# EAGLE board BOARD NWE (EAGLE 9.6.2)
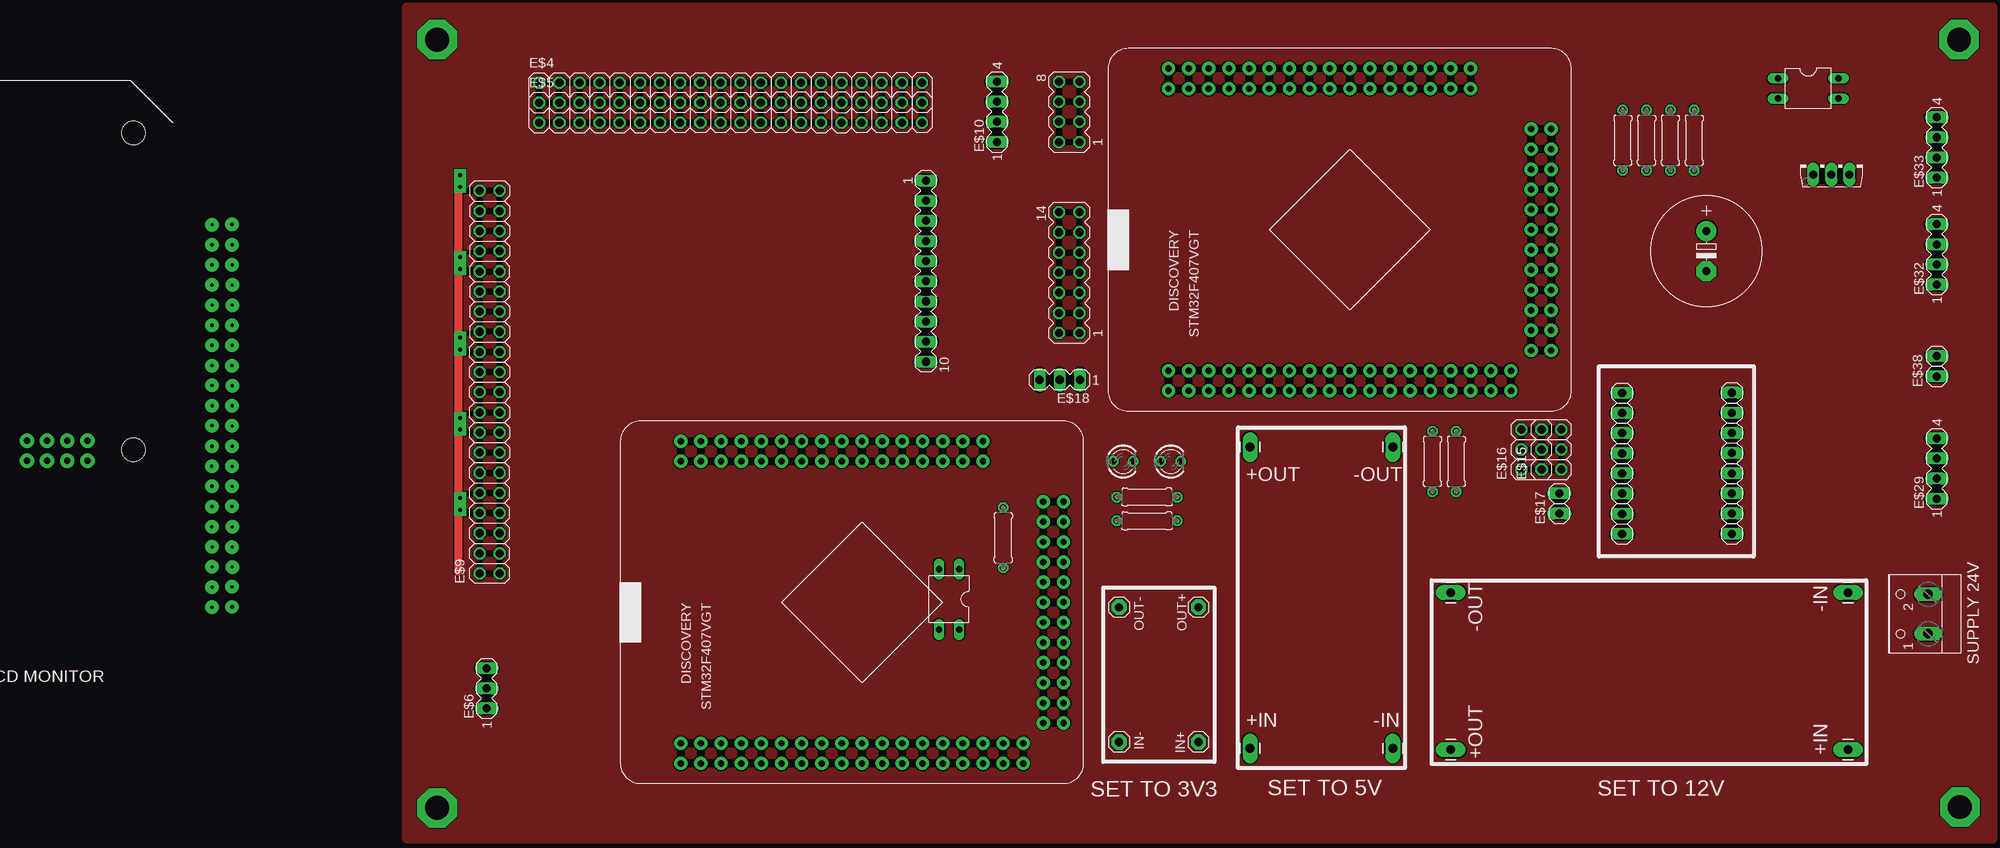
[diagram p0: board, top side]
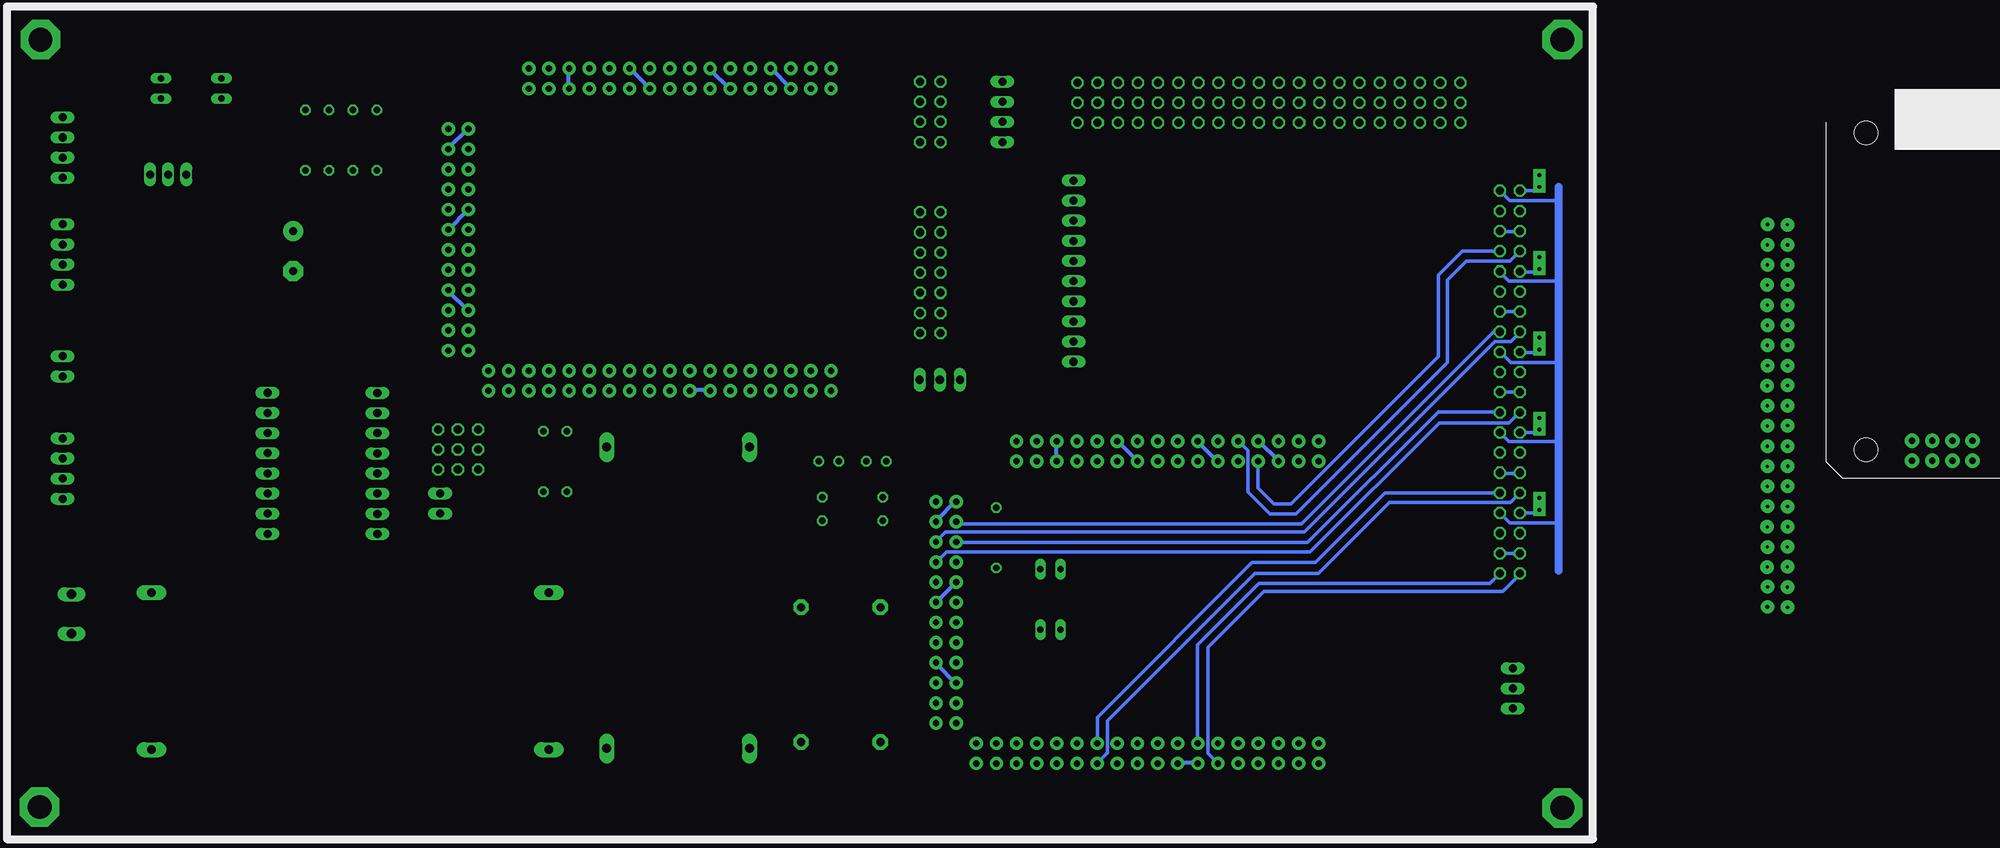
[diagram p1: board, bottom side, seen from below]

No outline drawn. Coordinates in mm, seen from the top.
Copper layers (1*16): Top 0.035mm / dielectric 1.5mm / Bottom 0.035mm
Design rules "default": minimum track width 6mil, minimum drill 0.35mm, track to track 6mil, track to pad 6mil, pad to pad 6mil, via to via 6mil, smd to smd 6mil, copper to edge 40mil, drill to drill 6mil, minimum pad ring 10mil, minimum via ring 8mil, stop-mask expansion 4mil, vias tented up to drill 0mil, thermal gap 10mil

## Footprints (pad centres in the part's own frame; a part is rotated, then mirrored left to right if it is on the bottom)
STM32F407VGT = drill 0.8 pad 1.676: 1 22.86,12.7; 2 25.4,12.7; 3 22.86,15.24; 3.3V(0) -12.7,-25.4; 3.3V(1) 22.86,-20.32; 3.3V(3) 10.16,17.78; 4 25.4,15.24; GND -15.24,-27.94; GND(0) -15.24,-25.4; GND(1) 25.4,-20.32; GND(2) -15.24,10.16; GND(3) 12.7,17.78; PA0 25.4,-15.24; PA1 22.86,-12.7; PA2 25.4,-12.7; PA3 25.4,-10.16; PA4 22.86,-7.62; PA5 25.4,-7.62; PA6 22.86,-5.08; PA7 25.4,-5.08; PA8 -15.24,7.62; PA9 -12.7,5.08; PA10 -15.24,5.08; PA11 -12.7,2.54; PA12 -15.24,2.54; PA13 -12.7,0; PA14 -15.24,0; PA15 -12.7,-2.54; PB0 22.86,0; PB1 25.4,0; PB2 25.4,10.16; PB3 -12.7,-17.78; PB4 -15.24,-17.78; PB5 -12.7,-20.32; PB6 -15.24,-20.32; PB7 -12.7,-22.86; PB8 22.86,2.54; PB9 25.4,2.54; PB10 15.24,17.78; PB11 12.7,20.32; PB12 10.16,20.32; PB13 7.62,17.78; PB14 7.62,20.32; PB15 5.08,17.78; PC0 22.86,-17.78; PC1 25.4,-17.78; PC2 22.86,-15.24; PC3 22.86,-10.16; PC4 22.86,-2.54; PC5 25.4,-2.54; PC6 -5.08,20.32; PC7 -7.62,17.78; PC8 -7.62,20.32; PC9 -12.7,7.62; PC10 -15.24,-2.54; PC11 -12.7,-5.08; PC12 -15.24,-5.08; PC13 25.4,-22.86; PD0 -12.7,-7.62; PD1 -15.24,-7.62; PD2 -12.7,-10.16; PD3 -15.24,-10.16; PD4 -12.7,-12.7; PD5 -15.24,-12.7; PD6 -12.7,-15.24; PD7 -15.24,-15.24; PD8 5.08,20.32; PD9 2.54,17.78; PD10 2.54,20.32; PD11 0,17.78; PD12 0,20.32; PD13 -2.54,17.78; PD14 -2.54,20.32; PD15 -5.08,17.78; PE0 -15.24,-22.86; PE1 22.86,5.08; PE2 22.86,-27.94; PE3 25.4,-27.94; PE4 22.86,-25.4; PE5 25.4,-25.4; PE6 22.86,-22.86; PE7 25.4,5.08; PE8 22.86,7.62; PE9 25.4,7.62; PE10 22.86,10.16; PE11 20.32,20.32; PE12 20.32,17.78; PE13 17.78,20.32; PE14 17.78,17.78; PE15 15.24,20.32; VCC -12.7,-27.94; VCC(2) -12.7,10.16
MA10-1 = drill 1.016 long: 1 -11.43,0; 2 -8.89,0; 3 -6.35,0; 4 -3.81,0; 5 -1.27,0; 6 1.27,0; 7 3.81,0; 8 6.35,0; 9 8.89,0; 10 11.43,0
2X20 = drill 1.016 octagon: 1 -24.13,-1.27; 2 -24.13,1.27; 3 -21.59,-1.27; 4 -21.59,1.27; 5 -19.05,-1.27; 6 -19.05,1.27; 7 -16.51,-1.27; 8 -16.51,1.27; 9 -13.97,-1.27; 10 -13.97,1.27; 11 -11.43,-1.27; 12 -11.43,1.27; 13 -8.89,-1.27; 14 -8.89,1.27; 15 -6.35,-1.27; 16 -6.35,1.27; 17 -3.81,-1.27; 18 -3.81,1.27; 19 -1.27,-1.27; 20 -1.27,1.27; 21 1.27,-1.27; 22 1.27,1.27; 23 3.81,-1.27; 24 3.81,1.27; 25 6.35,-1.27; 26 6.35,1.27; 27 8.89,-1.27; 28 8.89,1.27; 29 11.43,-1.27; 30 11.43,1.27; 31 13.97,-1.27; 32 13.97,1.27; 33 16.51,-1.27; 34 16.51,1.27; 35 19.05,-1.27; 36 19.05,1.27; 37 21.59,-1.27; 38 21.59,1.27; 39 24.13,-1.27; 40 24.13,1.27
MA03-1 = drill 1.016 long: 1 -2.54,0; 2 0,0; 3 2.54,0
MA04-2 = drill 1.016 octagon: 1 -3.81,-1.27; 2 -3.81,1.27; 3 -1.27,-1.27; 4 -1.27,1.27; 5 1.27,-1.27; 6 1.27,1.27; 7 3.81,-1.27; 8 3.81,1.27
DRIVER_BTS = drill 0.8 pad 1.8: GND 26.28,-41.42; L_EN 31.36,-41.42; L_IS 28.82,-41.42; LPWM 33.9,-41.42; R_EN 31.36,-38.88; R_IS 28.82,-38.88; RPWM 33.9,-38.88; VCC 26.28,-38.88 | hole 3: 0.01,-40.03; 39.73,-40.05; 0.01,-0.03; 39.73,-0.05
MA04-1 = drill 1.016 long: 1 -3.81,0; 2 -1.27,0; 3 1.27,0; 4 3.81,0
LED3MM = drill 0.813 octagon: A -1.27,0; K 1.27,0
1X01_LONGPAD = drill 1.118 pad 1.88 long: 1 0,0
2X03 = drill 1.016 octagon: 1 -2.54,-1.27; 2 -2.54,1.27; 3 0,-1.27; 4 0,1.27; 5 2.54,-1.27; 6 2.54,1.27
1X02 = drill 1.016 long: 1 -1.27,0; 2 1.27,0
0207/7 = drill 0.813 octagon: 1 -3.81,0; 2 3.81,0
1X08 = drill 1.016 long: 1 -8.89,0; 2 -6.35,0; 3 -3.81,0; 4 -1.27,0; 5 1.27,0; 6 3.81,0; 7 6.35,0; 8 8.89,0
DIL04 = drill 0.813 long: 1 -1.27,-3.81; 2 1.27,-3.81; 3 1.27,3.81; 4 -1.27,3.81
W237-102 = drill 1.194 long: 1 -2.5,-1.27; 2 2.5,-1.27
MA07-2 = drill 1.016 octagon: 1 -7.62,-1.27; 2 -7.62,1.27; 3 -5.08,-1.27; 4 -5.08,1.27; 5 -2.54,-1.27; 6 -2.54,1.27; 7 0,-1.27; 8 0,1.27; 9 2.54,-1.27; 10 2.54,1.27; 11 5.08,-1.27; 12 5.08,1.27; 13 7.62,-1.27; 14 7.62,1.27
E5-13 = drill 1.016 pad 2.54: + -2.54,0 | drill 1.016 pad 2.54 octagon: - 2.54,0
TO126AV = drill 1.016 long: B 2.286,-1.27; C 0,-1.27; E -2.286,-1.27
1X01 = drill 1.016 pad 1.93 octagon: 1 0,0

## Placement (x,y rotation side)
E$1  [STM32F407VGT]  234.66,115.31 270 top
E$2  [STM32F407VGT]  173.16,68.31 270 top
E$3  [MA10-1]  176.12,105 270 top
E$4  [2X20]  151.5,127.5 0 top
E$5  [2X20]  151.5,125 0 top
E$6  [MA03-1]  120.75,52.38 90 top
E$7  [MA04-2]  194.2,125.1 90 top
E$8  [DRIVER_BTS]  36.5,122.5 0 top
E$9  [2X20]  121.12,91 90 top
E$10  [MA04-1]  185.1,125.1 90 top
E$11  [LED3MM]  201,81 0 top
E$12  [1X01_LONGPAD]  235,82.8 180 top
E$13  [1X01_LONGPAD]  217,82.8 180 top
E$14  [LED3MM]  207,81 0 top
E$15  [2X03]  255,82.5 90 top
E$16  [2X03]  252.5,82.5 90 top
E$17  [1X02]  256,75.7 90 top
E$18  [MA03-1]  193,91.3 180 top
E$19  [0207/7]  204,76.5 180 top
E$20  [0207/7]  204,73.5 180 top
E$21  [0207/7]  240,81 270 top
E$22  [0207/7]  243,81 270 top
E$23  [1X01_LONGPAD]  242.3,44.65 90 top
E$24  [1X01_LONGPAD]  242.3,64.45 90 top
E$25  [1X01_LONGPAD]  292.4,64.45 90 top
E$26  [1X01_LONGPAD]  292.4,44.65 90 top
E$27  [1X01_LONGPAD]  235,44.8 180 top
E$28  [1X01_LONGPAD]  217,44.8 180 top
E$29  [MA04-1]  303.6,80.1 90 top
E$30  [1X08]  263.91,80.75 90 top
E$31  [1X08]  277.77,80.77 90 top
E$32  [MA04-1]  303.6,107.1 90 top
E$33  [MA04-1]  303.6,120.6 90 top
E$34  [0207/7]  264,121.5 270 top
E$35  [0207/7]  267,121.5 270 top
E$36  [0207/7]  270,121.5 270 top
E$37  [0207/7]  273,121.5 270 top
E$38  [1X02]  303.6,93 90 top
E$39  [DIL04]  179.05,63.62 180 top
E$40  [0207/7]  185.88,71.38 270 top
E$45  [W237-102]  301.22,61.75 90 top
E$46  [MA07-2]  194.2,104.81 90 top
E$93  [E5-13]  274.53,107.53 270 top
E$94  [TO126AV]  290.3,118.45 0 top
E$95  [DIL04]  287.38,128.05 270 top
IN+  [1X01]  210.5,45.6 270 top
IN-  [1X01]  200.5,45.6 270 top
OUT+  [1X01]  210.5,62.6 270 top
OUT-  [1X01]  200.5,62.6 270 top

## Library data of the parts
E$1 E$2 E$8 = KRI COMPONENT
E$3 E$6 E$7 E$10 E$18 E$29 E$32 E$33 E$46 = con-lstb
E$4 E$5 E$9 IN+ IN- OUT+ OUT- = adafruit
E$11 E$14 = led
E$12 E$13 E$23-E$28 = SparkFun-Connectors
E$15-E$17 E$38 = Connector
E$19-E$22 E$34-E$37 E$40 E$93 = rcl
E$30 E$31 = pinhead
E$39 E$95 = ic-package
E$45 = con-wago-500
E$94 = transistor-power

## Nets
S$18: IN-.1
S$43: OUT+.1
S$44: OUT-.1
S$78: E$13.1
S$145: E$30.7
S$156: E$12.1
S$196: IN+.1
S$214: E$26.1

## Tracks (layer width: path | path; a pad name or v marks a point on that pad's centre or on a via)
DD
  pour Top: 110.6,138.4 310.7,138.4 310.7,33.3 110.6,33.3 110.6,138.4
S$1
  Bottom 0.5: 222,90 224.5,90
S$2
  Bottom 0.5: 239.8,128 239.8,130.5
S$3
  Bottom 0.5: 214.3,130.6 211.8,128.1
S$4
  Bottom 0.5: 255,102.5 252.5,100
S$5
  Bottom 0.5: 232.1,130.6 229.5,128
S$6
  Bottom 0.5: 222,130.5 219.5,128
S$7
  Bottom 0.5: 255,110.2 252.4,112.8
S$8
  Bottom 0.5: 252.5,123 255,120.5
S$9
  Bottom 0.5: 160.5,43 163,43
S$10
  Bottom 0.5: 178.3,81 178.3,83.5
S$11
  Bottom 0.5: 152.8,83.6 150.3,81.1
S$12
  Bottom 0.5: 193.5,55.5 191,53
S$13
  Bottom 0.5: 170.6,83.6 168,81
S$14
  Bottom 0.5: 160.5,83.5 158,81
S$15
  Bottom 0.5: 193.5,63.2 190.9,65.8
S$16
  Bottom 0.5: 191,76 193.5,73.5
S$17  (via drill 0.4 pad 1.7)
  other vias: 86.12,110.85
S$19  (via drill 0.4 pad 1.7)
  other vias: 88.62,110.9
S$20  (via drill 0.4 pad 1.7)
  other vias: 88.65,108.33
S$21  (via drill 0.4 pad 1.7)
  other vias: 86.1,108.33
S$22  (via drill 0.4 pad 1.7)
  other vias: 86.1,105.8
S$23  (via drill 0.4 pad 1.7)
  other vias: 88.65,105.8
S$24  (via drill 0.4 pad 1.7)
  other vias: 86.1,103.25
S$25  (via drill 0.4 pad 1.7)
  other vias: 88.67,103.25
S$26  (via drill 0.4 pad 1.7)
  other vias: 86.12,100.7
S$27  (via drill 0.4 pad 1.7)
  other vias: 88.67,100.7
S$28  (via drill 0.4 pad 1.7)
  other vias: 86.1,98.17
S$29  (via drill 0.4 pad 1.7)
  other vias: 88.65,98.17
S$30  (via drill 0.4 pad 1.7)
  other vias: 86.1,95.65
S$31  (via drill 0.4 pad 1.7)
  other vias: 88.65,95.65
S$32  (via drill 0.4 pad 1.7)
  other vias: 86.1,93.08
S$33  (via drill 0.4 pad 1.7)
  other vias: 88.62,93.08
S$34  (via drill 0.4 pad 1.7)
  other vias: 86.1,90.58
S$35  (via drill 0.4 pad 1.7)
  other vias: 88.67,90.55
S$36  (via drill 0.4 pad 1.7)
  other vias: 88.65,88.03
S$37  (via drill 0.4 pad 1.7)
  other vias: 86.12,88.03
S$38  (via drill 0.4 pad 1.7)
  other vias: 86.1,85.53
S$39  (via drill 0.4 pad 1.7)
  other vias: 88.65,85.47
S$40  (via drill 0.4 pad 1.7)
  other vias: 88.65,82.92
S$41  (via drill 0.4 pad 1.7)
  other vias: 86.1,82.92
S$42  (via drill 0.4 pad 1.7)
  other vias: 86.08,80.4
S$45  (via drill 0.4 pad 1.7)
  other vias: 88.65,80.38
S$46  (via drill 0.4 pad 1.7)
  other vias: 86.1,77.88
S$47  (via drill 0.4 pad 1.7)
  other vias: 88.65,77.85
S$48  (via drill 0.4 pad 1.7)
  other vias: 86.1,75.3
S$49  (via drill 0.4 pad 1.7)
  other vias: 88.62,75.33
S$50  (via drill 0.4 pad 1.7)
  other vias: 86.08,72.78
S$51  (via drill 0.4 pad 1.7)
  other vias: 88.67,72.75
S$52  (via drill 0.4 pad 1.7)
  other vias: 86.12,70.22
S$53  (via drill 0.4 pad 1.7)
  other vias: 88.65,70.2
S$54  (via drill 0.4 pad 1.7)
  other vias: 86.12,67.7
S$55  (via drill 0.4 pad 1.7)
  other vias: 88.67,67.67
S$56  (via drill 0.4 pad 1.7)
  other vias: 86.12,65.15
S$57  (via drill 0.4 pad 1.7)
  other vias: 88.62,65.17
S$58  (via drill 0.4 pad 1.7)
  other vias: 86.1,62.6
S$59  (via drill 0.5 pad 1.7)
  other vias: 88.65,62.65
S$60
  Bottom 0.45: 122.38,107.5 127.12,107.5 130.12,104.5 130.12,94.25 148.75,75.62 150.88,75.62 152.88,77.62 152.88,81
S$62
  Bottom 0.45: 119.88,97.25 121,96.12 123,96.12 147,72.12 192.25,72.12 193.5,70.88
S$63
  Bottom 0.45: 122.38,97.38 123.12,97.38 147.38,73.12 190.62,73.12 190.88,73.38
S$64
  Bottom 0.45: 122.38,87.25 130.12,87.25 146.62,70.75 191,70.75
S$65
  Bottom 0.45: 119.88,87.25 121.25,85.88 130,85.88 146.3,69.58 192.18,69.58 193.5,68.25
S$66
  Bottom 0.45: 122.5,77 136.88,77 145.62,68.25 153.62,68.25 173.12,48.75 173.12,45.5
S$67
  Bottom 0.45: 119.88,77 121.08,75.8 136.32,75.8 145.25,66.88 153.25,66.88 171.88,48.25 171.88,44.25 173.12,43
S$68
  Bottom 0.45: 122.38,66.88 123.62,65.62 152.75,65.62 160.5,57.88 160.5,45.5
S$69
  Bottom 0.45: 119.75,66.88 122,64.62 152.12,64.62 159.2,57.55 159.2,44.2 158,43
S$70
  Bottom 0.45: 119.75,110 122.38,110
S$71
  Bottom 0.45: 119.88,99.88 122.5,99.88
S$72
  Bottom 0.45: 119.88,89.75 122.5,89.75
S$73
  Bottom 0.45: 119.75,79.5 122.5,79.5
S$74
  Bottom 0.45: 119.88,69.38 122.38,69.38
S$75
  Bottom 0.45: 155.38,83.62 154.12,82.38 154.12,77.12 151.38,74.38 148.12,74.38 129,93.5 129,103.88 126.62,106.25 121.12,106.25 119.88,107.5
S$76
  Bottom 0.45: 122.38,74.5 121.12,73.25 115,73.25 | 122.38,84.62 121.25,83.5 115.12,83.5 115.12,83.88 115,83.88 | 122.38,104.88 121.25,103.75 115,103.75 114.88,103.75 | 122.38,115.12 121.12,113.88 115,113.88 | 122.38,94.88 121,93.5 115,93.5 | 115.12,83.38 115,83.38
  Bottom 1: 115,115.62 115,113.88 115,103.75 115,93.5 115,83.88 115,83.38 115,73.25 115,67.25
S$77
  Top 1: 117.12,115.75 117.12,67.12
S$80  (via drill 0.5 pad 1.5)
  Bottom 0.45: 119.75,115.12 117.88,115.12 v117.38,115.62
S$81  (via drill 0.5 pad 1.5)
  other vias: 117.38,117.12
S$82  (via drill 0.5 pad 1.5)
  Bottom 0.45: 119.88,104.88 117.75,104.88 v117.38,105.25
S$83  (via drill 0.5 pad 1.5)
  other vias: 117.38,106.75
S$84  (via drill 0.5 pad 1.5)
  Bottom 0.45: 119.88,94.75 117.75,94.75 v117.38,95.12
S$85  (via drill 0.5 pad 1.5)
  other vias: 117.38,96.62
S$86  (via drill 0.5 pad 1.5)
  Bottom 0.45: 119.88,84.62 117.75,84.62 v117.38,85
S$87  (via drill 0.5 pad 1.5)
  other vias: 117.38,86.5
S$88  (via drill 0.5 pad 1.5)
  Bottom 0.45: 119.88,74.5 117.75,74.5 v117.38,74.88
S$89  (via drill 0.5 pad 1.5)
  other vias: 117.38,76.38
S$192  (via drill 3 pad 5)
  other vias: 114.5,134.2
S$193  (via drill 3 pad 5)
  other vias: 114.5,37.3
S$194  (via drill 3 pad 5)
  other vias: 306.5,37.4
S$195  (via drill 3 pad 5)
  other vias: 306.4,134.2

## Text on the board
tPlace: +OUT | -OUT | -IN | SWD | -OUT | CLK | IO | SUPPLY 24V | LCD MONITOR | GND | 3V3 | +IN | -IN | +OUT | +IN | SET TO 3V3 | SET TO 12V | SET TO 5V